# Altium PCB T962a.PcbDoc
Units mm, origin at the board's own origin, x right, y up, seen from the top; angles counter-clockwise.
Board outline 93 x 70.03 mm, 2 copper layers (Top Layer, Bottom Layer); 73 components, 72 nets, 284 pads, 122 vias.
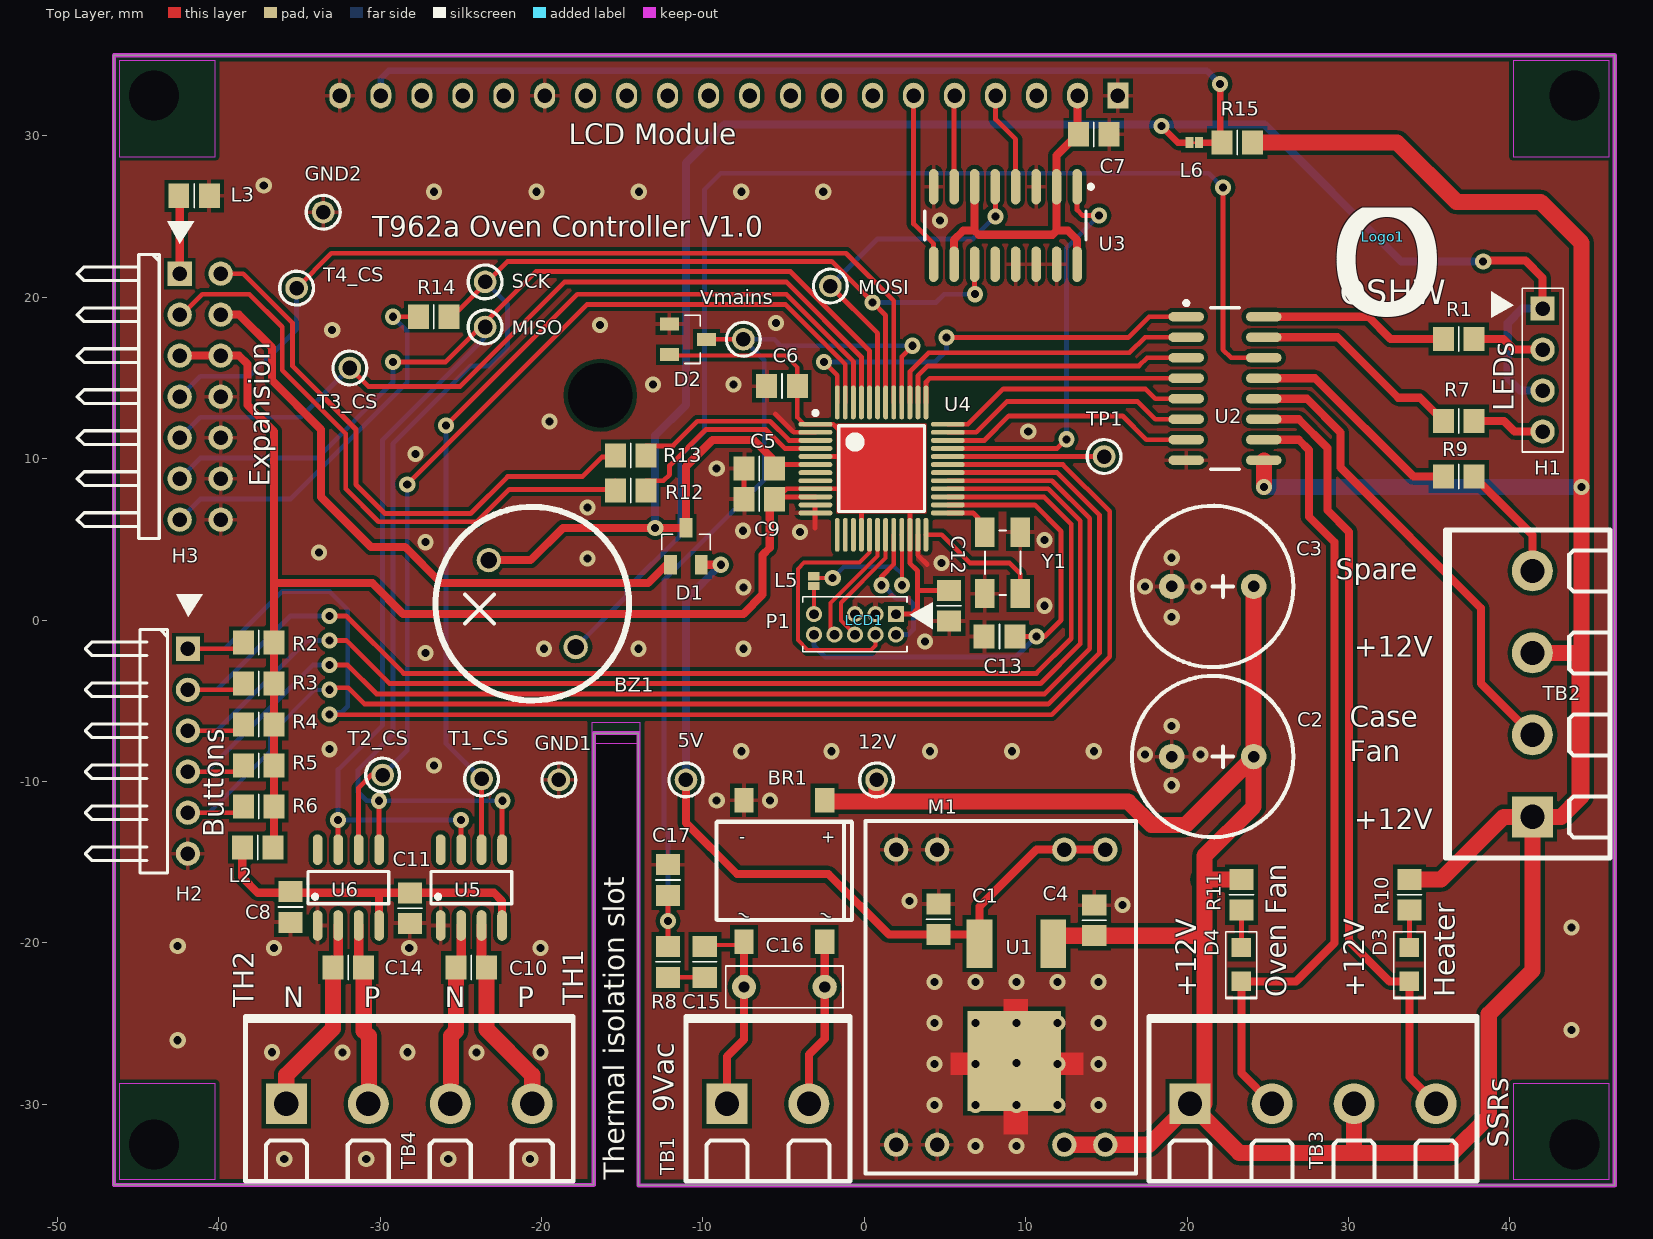
[diagram p0: Top Layer view]
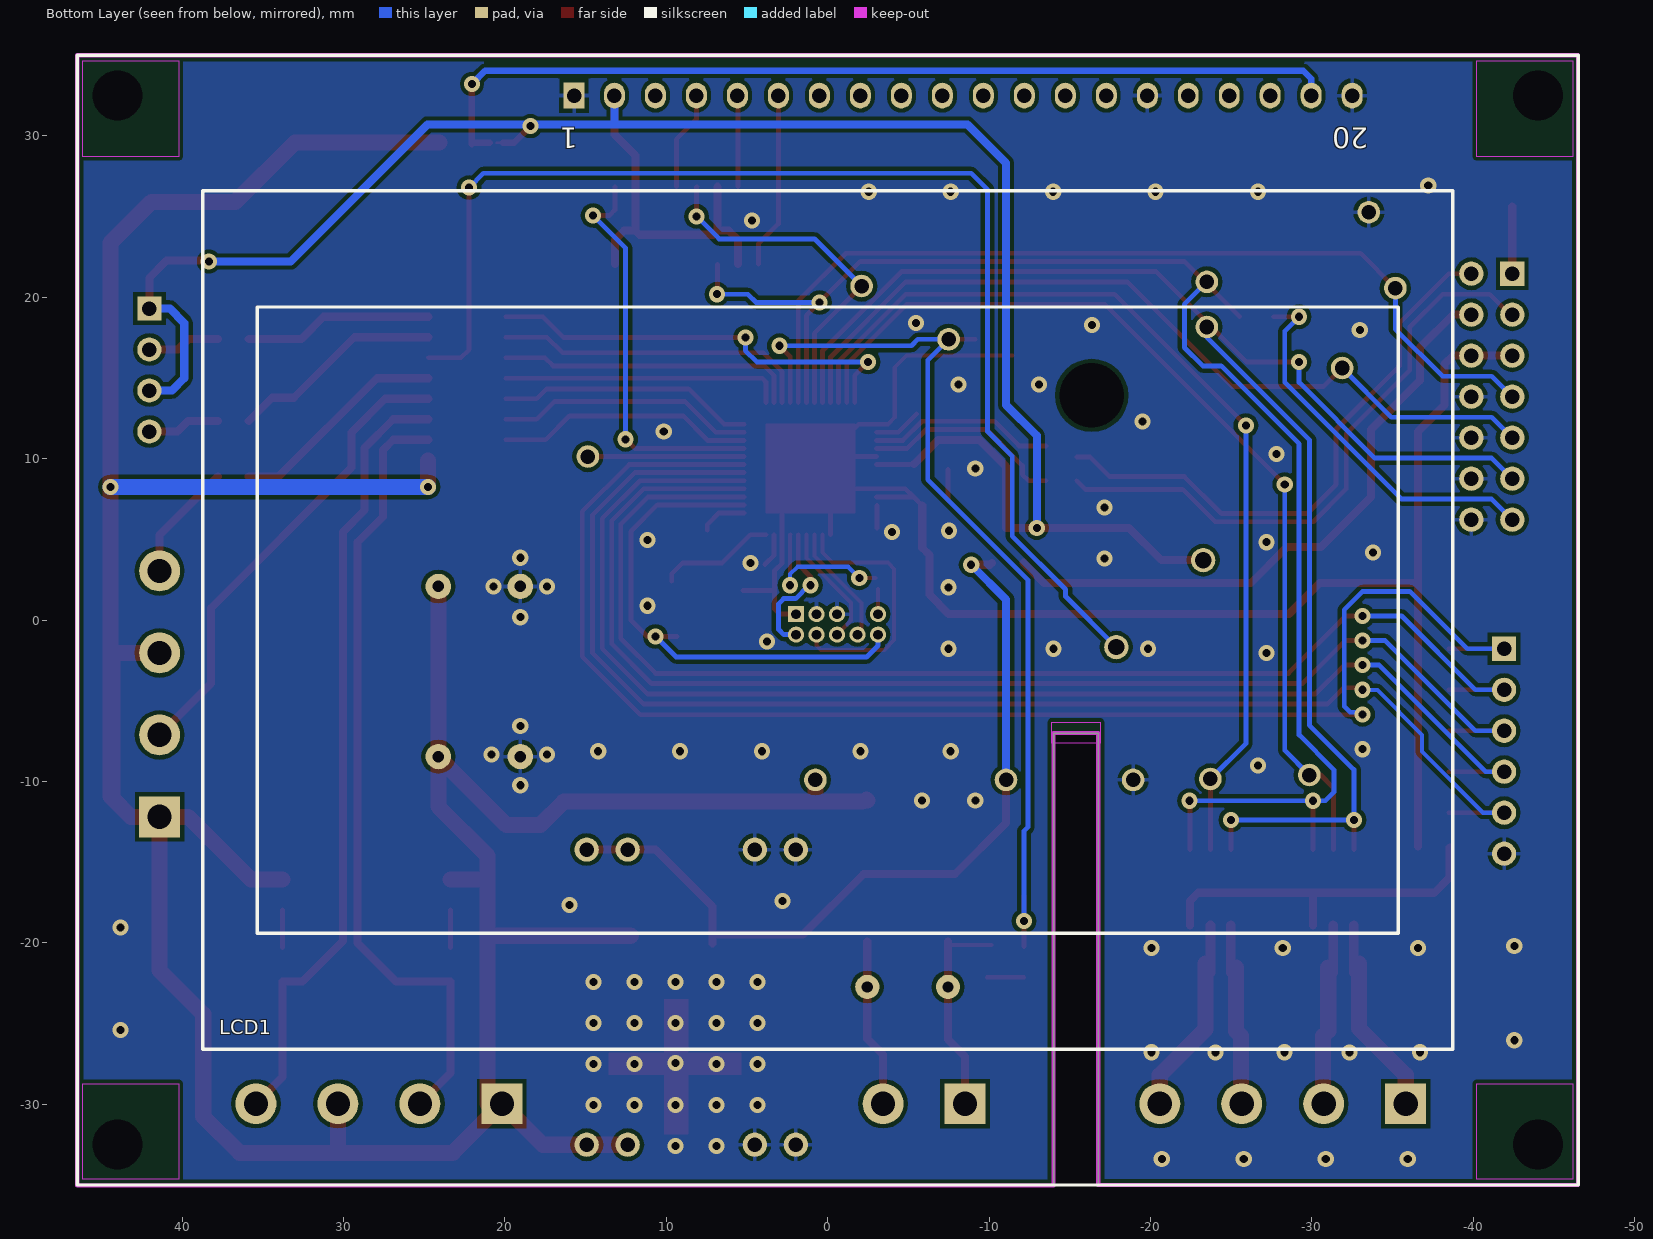
[diagram p1: Bottom Layer view, seen from below]
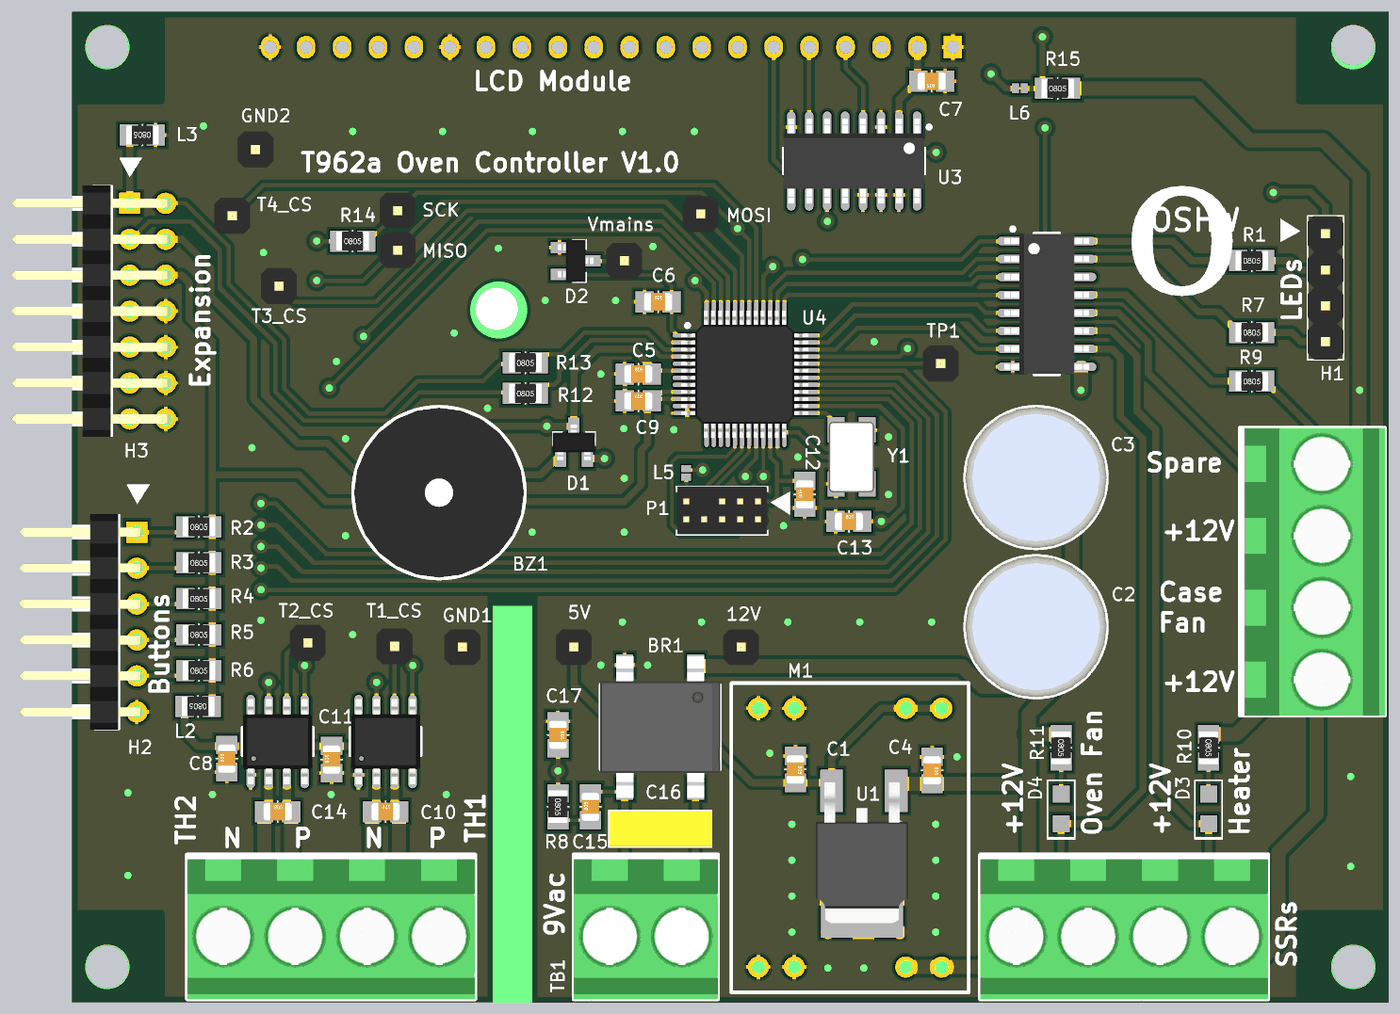
[diagram p2: 3D render of the assembled board from above, using the file's embedded part models]

## Layer stack, top to bottom
Top Solder: solder mask 0.0102, Solder Resist, Dk 3.5
Top Layer: signal copper 0.0356
Dielectric 1: dielectric 0.32, FR-4, Dk 4.8
Bottom Layer: signal copper 0.0356
Bottom Solder: solder mask 0.0102, Solder Resist, Dk 3.5

## Board outline
-46.495,-35 -46.495,35 46.505,35 46.505,-35.029 -14,-35.029 -14,-7 -16.764,-7 -16.764,-35

## Design rules (kind name [scope] priority, off if disabled: settings)
Clearance Clearance_Poly [InPoly] p1: gap=0.254
Clearance [All] p2: gap=0.178
HoleSize [All] p1: absolutevalues=TRUE maxlimit=2539.975 minlimit=0.025 maxpercent=80.000 minpercent=20.000
MinimumSolderMaskSliver [All] p1 off: minsoldermaskwidth=0.1
PlaneConnect PlaneConnect_Poly [IsVia] p1: planeconnectstyle=Direct reliefexpansion=0.508 reliefentries=4 reliefconductorwidth=0.254 reliefairgap=0.254
PlaneConnect [All] p2: planeconnectstyle=Relief reliefexpansion=0.508 reliefentries=4 reliefconductorwidth=0.254 reliefairgap=0.254
PolygonConnect PolygonConnect_Poly [IsVia] p1: connectstyle=Direct reliefconductorwidth=0.254 reliefentries=4 polygonreliefangle="90 Angle" airgapwidth=0.254
PolygonConnect [All] p2: connectstyle=Relief reliefconductorwidth=0.254 reliefentries=4 polygonreliefangle="90 Angle" airgapwidth=0.254
RoomDefinition T962a-P1 [InComponentClass('T962a-P1')] p1: confinementstyle=ConfineIn formatcopy=TRUE lockcomponents=FALSE outline -51.13,-36 51.181,-36 51.181,38.25 -51.13,38.25
RoutingVias [All] p1: holewidth=0.711 width=1.27 viastyle="Through Hole" minholewidth=0.711 minwidth=1.27 maxholewidth=0.711 maxwidth=1.27
SilkToBoardRegionClearance [All] p1 off:
SilkToSolderMaskClearance [IsPad] p1: minsilkscreentomaskgap=0.2 clearancetoexposedcopper=TRUE
SolderMaskExpansion [All] p1: expansion=0.102
Width [All] p1: maxlimit=1.016 minlimit=0.254 preferedwidth=0.254
25 further rules are at their usual default settings.

## Components (designator, comment, footprint, x,y, rotation, side; value= is the part's Value field where it differs from the comment)
5V "TP" "PCBPIN - 0.9mm" -11.049,-9.906 r0 top
12V "TP" "PCBPIN - 0.9mm" 0.762,-9.906 r0 top
BR1 "DF10S" BRIDGE-SMT -4.953,-15.545 r0 top
BZ1 "Buzzer_PCB" BUZZER_SMALL -20.574,1.016 r135 top
C1 "4u7/10V" CCNP2012-0805 4.604,-18.544 r270 top
C2 "470uF/25V" RB5/10x13mm 24.13,-8.458 r180 top
C3 "470uF/25V" RB5/10x13mm 24.13,2.083 r180 top
C4 "100nF" CCNP2012-0805 14.256,-18.61 r270 top
C5 "100nF" CCNP2012-0805 -6.498,9.398 r0 top
C6 "2u2F" CCNP2012-0805 -5.1,14.5 r0 top
C7 "100nF" CCNP2012-0805 14.224,30.099 r180 top
C8 "100nF" CCNP2012-0805 -35.56,-17.78 r90 top
C9 "2u2F/6V" CCNP2012-0805 -6.498,7.493 r0 top
C10 "10nF" CCNP2012-0805 -24.348,-21.531 r0 top
C11 "100nF" CCNP2012-0805 -28.158,-17.848 r90 top
C12 "100nF" CCNP2012-0805 5.258,0.889 r90 top
C13 "100nF" CCNP2012-0805 8.382,-1.016 r0 top
C14 "10nF" CCNP2012-0805 -31.968,-21.531 r0 top
C15 "100nF" CCNP2012-0805 -9.881,-21.184 r90 top
C16 "100nF/63Vac" "CAP - SMALL MKT" -4.953,-22.733 r0 top
C17 "1nF" CCNP2012-0805 -12.167,-16.104 r270 top
D1 "PMEG2005CT" SOT23 -11.049,4.572 r0 top
D2 "BAT54S" SOT23 -10.922,17.399 r270 top
D3 "LED Red" LED-SMT-2 33.782,-21.336 r270 top
D4 "LED Red" LED-SMT-2 23.368,-21.336 r270 top
GND1 "TP" "PCBPIN - 0.9MM" -18.923,-9.906 r90 top
GND2 "TP" "PCBPIN - 0.9MM" -33.528,25.273 r90 top
H1 "Header 1x4" HDR1X4S 42.037,19.304 r270 top
H2 "Keyboard" HDR1X6H -41.91,-1.778 r270 top
H3 "2x5 Header" HDR2X7H -42.418,21.463 r270 top
L2 "FB" CR2012-0805 -37.592,-14.097 r180 top
L3 "FB" CR2012-0805 -41.529,26.289 r180 top
L5 "LinkOpen" SolderBridge(Open) -3.124,2.413 r90 top net-tie
L6 "LinkClosed" SolderBridge(Closed) 20.447,29.591 r180 top net-tie
LCD1 "LCD-XC-4617" LCD_XC-4617 0,0 r0 top locked
Logo1 "OSHW Logo" OSHW 32.131,23.749 r0 top
M1 "IT-IM130731001" IT-IM130731001 8.458,-23.368 r90 top
MISO "TP" "PCBPIN - 0.9mm" -23.495,18.161 r0 top
MOSI "TP" "PCBPIN - 0.9mm" -2.1,20.7 r0 top
P1 "SWD2X5" SWD-2X5 1.964,0.369 r180 top
R1 "390R" CR2012-0805 36.83,17.419 r0 top
R2 "4K7" CR2012-0805 -37.531,-1.397 r0 top
R3 "4K7" CR2012-0805 -37.531,-3.937 r0 top
R4 "4K7" CR2012-0805 -37.531,-6.477 r0 top
R5 "4K7" CR2012-0805 -37.531,-9.017 r0 top
R6 "4K7" CR2012-0805 -37.531,-11.557 r0 top
R7 "390R" CR2012-0805 36.83,12.339 r0 top
R8 "47K" CR2012-0805 -12.167,-21.184 r270 top
R9 "DNP" CR2012-0805 36.83,8.89 r0 top
R10 "10K" CR2012-0805 33.782,-17.018 r270 top
R11 "10K" CR2012-0805 23.368,-17.018 r270 top
R12 "33R" CR2012-0805 -14.478,8.036 r0 top
R13 "33R" CR2012-0805 -14.478,10.195 r0 top
R14 "85R" CR2012-0805 -26.67,18.796 r0 top
R15 "1K" CR2012-0805 23.114,29.591 r0 top
SCK "TP" "PCBPIN - 0.9mm" -23.495,20.955 r0 top
T1_CS "TP" "PCBPIN - 0.9mm" -23.713,-9.847 r0 top
T2_CS "TP" "PCBPIN - 0.9mm" -29.845,-9.601 r90 top
T3_CS "TP" "PCBPIN - 0.9mm" -31.877,15.621 r90 top
T4_CS "TP" "PCBPIN - 0.9mm" -35.179,20.574 r90 top
TB1 "Terminal2" MOLEX-39544-3002 -8.509,-29.972 r270 top
TB2 "Terminal4" MOLEX-39544-3004 41.402,-12.192 r0 top
TB3 "Terminal4" MOLEX-39544-3004 20.193,-29.972 r270 top
TB4 "Terminal4" MOLEX-39544-3004 -35.814,-29.972 r270 top
TP1 "TP" "PCBPIN - 0.9MM" 14.859,10.136 r0 top
U1 "NCP5501DT50RKG" TO-252 9.43,-23.69 r180 top
U2 "ULN2003ADR" SO-16_N 22.352,14.351 r0 top
U3 "74HCT157N" SO-16_N 8.745,24.453 r270 top
U4 "MK20DX128VLF5" TSQFP50P900X900-48M 1.075,9.386 r0 top
U5 "MAX31855KASA+T" SO-8_L -24.348,-16.578 r90 top
U6 "MAX31855KASA+T" SO-8_L -31.968,-16.578 r90 top
Vmains "TP" "PCBPIN - 0.9mm" -7.493,17.399 r0 top
Y1 "ABM3B-8.000MHZ-B2-T" "CRYSTAL_SMT - ABM3B" 8.568,3.544 r90 top

## Footprints (in the part's own frame and the unit in brackets; to place one, negate y for a bottom-side part, rotate by r counter-clockwise, add the part's x,y. Pads: shape width x height; smd on the part's side, far side on the other; paste and mask are expansions set on the pad)
BRIDGE-SMT [mm] "Bridge rectifier SMT"
  rect 1.2x1.52 smd: 1(2.5,4.375) 2(-2.5,4.375) 3(-2.5,-4.375) 4(2.5,-4.375)
  silkscreen extent -4.2,-3.05 4.2,3.05, body extent -4.24,-5.01 4.26,4.99, height 2.93
BUZZER_SMALL [mm] "BUZZER -  Adafruit"
  round 1.5 hole 1: 1(-3.81,0) 2(3.81,0)
  silkscreen extent -6,-6 6,6, body extent -5.99,-6 5.99,6, height 10
"CAP - SMALL MKT" [mm] "MKT Polyester block capacitor"
  round 1.5 hole 0.7: 1(-2.5,0) 2(2.5,0)
  silkscreen extent -3.63,-1.3 3.63,1.3, body extent -3.6,-1.25 3.6,1.25, height 6.5
CCNP2012-0805 [mm]
  rect 1.3x1.5 smd: 1(-0.95,0) 2(0.95,0)
  silkscreen extent 0,-0.75 0,0.75, body extent -1,-0.62 1,0.63, height 0.78
CR2012-0805 [mm]
  rect 1.3x1.5 smd: 1(-0.95,0) 2(0.95,0)
  silkscreen extent 0,-0.75 0,0.75, body extent -1.15,-0.67 1.15,0.68, height 0.76
"CRYSTAL_SMT - ABM3B" [mm] "Crystal SMT low profile (5.0 x 3.2 mm)"
  rect 1.8x1.2 smd: 1(-1.9,-1.1) 2(1.9,-1.1) 3(1.9,1.1) 4(-1.9,1.1)
  silkscreen extent -2,-1.1 2,1.1, body extent -2.51,-1.59 2.49,1.61, height 1.15
HDR1X4S [mm] "Connector; Header; 5 Position; Straight"
  rect 1.5x1.5 hole 0.9: 1(0,0)
  round 1.5 hole 0.9: 2(2.54,0) 3(5.08,0) 4(7.62,0)
  silkscreen extent -1.27,-3.18 8.89,1.27, body extent -1.27,-1.27 8.89,1.27, height 6
HDR1X6H [mm] "Connector; Header; 6 Position; Right Angle"
  rect 1.5x1.5 hole 0.9: 1(0,0)
  round 1.5 hole 0.9: 2(2.54,0) 3(5.08,0) 4(7.62,0) 5(10.16,0) 6(12.7,0)
  silkscreen extent -3.38,-6.35 13.89,0.91, body extent -1.27,-8.3 13.97,0.33, height 2.54
HDR2X7H [mm] "Connector; Header; 2x7 Position; Right Angle"
  rect 1.5x1.5 hole 0.9: 1(0,0)
  round 1.5 hole 0.9: 2(0,2.54) 3(2.54,0) 4(2.54,2.54) 5(5.08,0) 6(5.08,2.54) 7(7.62,0) 8(7.62,2.54) 9(10.16,0) 10(10.16,2.54) 11(12.7,0) 12(12.7,2.54) 13(15.24,0) 14(15.24,2.54)
  silkscreen extent -3.24,-6.35 16.41,0.89, body extent -1.27,-8.33 16.51,2.84, height 5.08
IT-IM130731001 [mm] "Buck Converter module"
  round 1.5 hole 0.9: IN0+(-9.144,-3.937) IN0-(-9.144,6.477) IN1+(-9.144,-6.477) IN1-(-9.144,3.937) OUT0+(9.144,-3.937) OUT0-(9.144,6.477) OUT1+(9.144,-6.477) OUT1-(9.144,3.937)
  silkscreen extent -10.92,-8.38 10.92,8.38, body extent -10.92,-8.38 10.92,8.38, height 6
LCD_XC-4617 [mm] "Duinotech XC-4617 128 x 64 LCD"
  round 3 hole 4: 0(-16.355,13.925)
  rect 1.3x1.6 hole 0.9: 1(15.72,32.5)
  oval 1.3x1.6 hole 0.9: 2(13.22,32.5) 3(10.68,32.5) 4(8.14,32.5) 5(5.6,32.5) 6(3.06,32.5) 7(0.52,32.5) 8(-2.02,32.5) 9(-4.56,32.5) 10(-7.1,32.5) 11(-9.64,32.5) 12(-12.18,32.5) 13(-14.72,32.5) 14(-17.26,32.5) 15(-19.8,32.5) 16(-22.34,32.5) 17(-24.88,32.5) 18(-27.42,32.5) 19(-29.96,32.5) 20(-32.5,32.5)
  round 3 hole 3.1: 21(-44,32.5) 22(44,32.5) 23(44,-32.5) 24(-44,-32.5)
  body extent -46.5,-35 46.5,35, height 11.3
LED-SMT-2 [mm] "Medium SMT LED HSMx-C170 (0805)"
  rect 1.2x1.2 smd: A(-1.05,0) K(1.05,0)
  silkscreen extent -2.03,-0.96 2.13,0.96, body extent -1.78,-0.76 1.78,0.76, height 1
MOLEX-39544-3002 [mm] "Wire-To-Board Terminal Block"
  rect 2.54x2.54 hole 1.5: 1(0,0)
  round 2.54 hole 1.5: 2(0,5.08)
  silkscreen extent -5.4,-2.54 4.83,7.62, body extent -5.08,-2.54 4.83,7.62, height 14.6
MOLEX-39544-3004 [mm] "Wire-To-Board Terminal Block"
  rect 2.54x2.54 hole 1.5: 1(0,0)
  round 2.54 hole 1.5: 2(0,5.08) 3(0,10.16) 4(0,15.24)
  silkscreen extent -5.4,-2.54 4.83,17.78, body extent -5.08,-2.54 4.83,17.78, height 14.6
OSHW [mm] "OSHW Logo"
"PCBPIN - 0.9mm" [mm]
  round 1.4 hole 0.9: 1(0,0)
  silkscreen extent -1.05,-1.05 1.05,1.05, body extent -1.27,-1.27 1.27,1.27, height 6
"PCBPIN - 0.9MM" [mm]
  round 1.4 hole 0.9: 1(0,0)
  silkscreen extent -1.05,-1.05 1.05,1.05, body extent -1.27,-1.27 1.27,1.27, height 6
RB5/10x13mm [mil]
  round 62 hole 28: 1(0,0) 2(200,0)
  silkscreen extent -97,-197 297,197, body extent -97,-197 297,197, height 512
SO-8_L [mm] "8-Pin Small Outline Integrated Circuit 1.27 mm Pitch, IPC High Density"
  oval 1.9x0.6 smd: 1(-2.35,1.905) 2(-2.35,0.635) 3(-2.35,-0.635) 4(-2.35,-1.905) 5(2.35,-1.905) 6(2.35,-0.635) 7(2.35,0.635) 8(2.35,1.905)
  silkscreen extent -1,-2.5 1,2.5, body extent -3,-2.45 3,2.45, height 1.7
SO-16_N [mm] "16-Pin Small Outline Integrated Circuit 1.27 mm Pitch, IPC Medium Density"
  oval 2.2x0.6 smd: 1(-2.4,4.445) 2(-2.4,3.175) 3(-2.4,1.905) 4(-2.4,0.635) 5(-2.4,-0.635) 6(-2.4,-1.905) 7(-2.4,-3.175) 8(-2.4,-4.445) 9(2.4,-4.445) 10(2.4,-3.175) 11(2.4,-1.905) 12(2.4,-0.635) 13(2.4,0.635) 14(2.4,1.905) 15(2.4,3.175) 16(2.4,4.445)
  silkscreen extent -2.52,-5 0.9,5.42, body extent -3,-4.95 3,4.95, height 1.4
SolderBridge(Closed) [mm]
  rect 0.5x0.7 smd: 1(-0.305,0) 2(0.305,0)
  Top Layer region: -0.152,-0.076 0.152,-0.076 0.152,0.076 -0.152,0.076
SolderBridge(Open) [mm]
  rect 0.5x0.7 smd: 1(-0.305,0) 2(0.305,0)
SOT23 [mm] "SOT-23; 3 Leads; Body 3.0 x 2.3 mm, inc. leads (LxW max)"
  rect 0.8x1.2 smd: 1(-0.95,-1.15) 2(0.95,-1.15) 3(0,1.15)
  silkscreen extent -1.5,-0.2 1.5,0.75, body extent -1.5,-1.25 1.5,1.25, height 1.05
SWD-2X5 [mm] "Connector; SWD; 2x5 Position"
  rect 1x1 hole 0.6: 1(0,0)
  round 1 hole 0.6: 2(0,1.27) 3(1.27,0) 4(1.27,1.27) 5(2.54,0) 6(2.54,1.27) 8(3.81,1.27) 9(5.08,0) 10(5.08,1.27)
  silkscreen extent -2.27,-1.06 5.77,2.33, body extent -0.63,-1.09 5.72,2.31, height 4.5
TO-252 [mm] "TO-252 Package"
  rect 1.6x3 smd: 1(-2.285,-3.64) 3(2.285,-3.64)
  rect 5.8x6.2 smd: 4(0.127,3.64)
  body extent -3.14,-4.23 3.4,5.71, height 2.29
TSQFP50P900X900-48M [mm] "Thin QFP, 48-Leads, Body 7x7mm, Pitch 0.5mm, IPC Low Density"
  oval 2.1x0.3 smd: 1(-4.1,2.75) 2(-4.1,2.25) 3(-4.1,1.75) 4(-4.1,1.25) 5(-4.1,0.75) 6(-4.1,0.25) 7(-4.1,-0.25) 8(-4.1,-0.75) 9(-4.1,-1.25) 10(-4.1,-1.75) 11(-4.1,-2.25) 12(-4.1,-2.75) 25(4.1,-2.75) 26(4.1,-2.25) 27(4.1,-1.75) 28(4.1,-1.25) 29(4.1,-0.75) 30(4.1,-0.25) 31(4.1,0.25) 32(4.1,0.75) 33(4.1,1.25) 34(4.1,1.75) 35(4.1,2.25) 36(4.1,2.75)
  oval 0.3x2.1 smd: 13(-2.75,-4.1) 14(-2.25,-4.1) 15(-1.75,-4.1) 16(-1.25,-4.1) 17(-0.75,-4.1) 18(-0.25,-4.1) 19(0.25,-4.1) 20(0.75,-4.1) 21(1.25,-4.1) 22(1.75,-4.1) 23(2.25,-4.1) 24(2.75,-4.1) 37(2.75,4.1) 38(2.25,4.1) 39(1.75,4.1) 40(1.25,4.1) 41(0.75,4.1) 42(0.25,4.1) 43(-0.25,4.1) 44(-0.75,4.1) 45(-1.25,4.1) 46(-1.75,4.1) 47(-2.25,4.1) 48(-2.75,4.1)
  silkscreen extent -4.22,-2.65 2.65,3.57, body extent -4.55,-4.5 4.45,4.5, height 1.6

## Part data
5V 12V GND1 GND2 MISO MOSI SCK T1_CS T2_CS T3_CS T4_CS TP1 Vmains: "Test Point"
BR1: "bRIDGE rECTIFIER"
BZ1: "Buzzer (Adafruit 1536)"
C1 C8 C10 C11 C13 C14: library part Cap_CCNP_0805, "Capacitor SMT 0805"
C2 C3: library part Cap-25ZLS470MEFC10X12, "Polarized Capacitor"
C4 C5 C6 C7 C9 C12 C15 C16 C17: library part Cap, "Capacitor"
D1: "Dual Schottky Diode (SMT)"
D2: "Dual Diode (SMT)"
D3 D4: library part "LED SMT,Red", "LED (Red SMT)"
H1: "Header, 5-Pin, Right Angle"
H2: library part "Header 6", "Header, 6-Pin"
H3: library part "Header 2x7H", "Header 2x7"
L2 L3: library part "Ferrite Bead 0805", "Ferrite Bead (0805) 0.045OHM, 2A"
LCD1: "LCD 128 x 64 pixel, ST7920 controller & contrast pot (Jaycar XC-4617)"
M1: "Itead Buck converter"
P1: "SWD Connector 2x5-Pin"
R1 R2 R3 R4 R5 R6 R7 R8 R9 R10 R11 R12 R13 R14 R15: library part Res_CR0805, "Resistor"
TB1: "MULTICOMP  MC24366 Wire-To-Board Terminal Block"
TB2 TB3 TB4: "MULTICOMP MC24368 Wire-To-Board Terminal Block"
U1: "Fixed LDO Voltage Regulator, 2.5V-16V in, 230mV Dropout, 5V/500mA out, TO-252-3"
U3: "Quad 2-1 Multiplexor"
U4: "Arm Cortex M4"
Y1: "Crystal 8MHz (MINIATURE SMT ABM3B)"

## Via types
v1: diameter 1, hole 0.5, Top Layer to Bottom Layer, tented both sides, 122 vias

## Nets (pads, with @x,y where several pads share a name; then routed paths per layer and width w, separated by ;. In a path a pad name is that pad's centre, name@x,y a point inside that pad or via, vN(x,y) a via of type N, cw(c..) or ccw(c..) an arc to the next point about the centre after c; other vN are vias at no path point)
3V3: C6.2 C9.2 C12.2 D2.2 H3.5 H3.6 L2.1 P1.1 R2.2 R3.2 R4.2 R5.2 R6.2 U4.1 U4.5 U4.9 U4.10 U4.16 U4.22 | length 110.4
  Top Layer w0.254: -11.437,16.383 -4.883,16.383 -4.15,15.65 C6.2 -4.15,12.55 -3.736,12.136 U4.1
  Top Layer w0.3: C9.2@-5.855,7.094 C9.2@-5.313,7.636 ; U4.10 C9.2@-5.313,7.636 ; U4.5 -0.461,10.136 ; U4.1 -3.025,12.133 -1.922,12.133 -0.952,11.163 ; -0.683,8.136 U4.9 -4.813,8.136 C9.2@-5.313,7.636 ; U4.16 -0.175,7.445 ; P1.1 2.98,0.369 3.3,0.689 3.3,3.05 2.825,3.525 U4.22 2.825,8.088 ; 3.31,1.839 C12.2
  Top Layer w0.5: H3.5 H3.6 -38.735,16.383 -38.227,15.875 -38.227,13.335 -36.581,11.689 -36.581,2.286 ; L2.1@-36.581,-14.036 R6.2 R5.2 R4.2 R3.2 R2.2 -36.581,2.286 ; C9.2@-5.855,7.094 -5.855,4.481 -6.299,4.036 -6.299,1.575 -7.493,0.381 -28.575,0.381 -30.48,2.286 -36.581,2.286
5V: BZ1.2 C5.2 C7.2 D1.3 H1.1 H1.3 L6.2 LCD1.2 U3.2 U3.6 U3.10 U3.16 U4.6 | length 144.5
  Top Layer w0.3: C5.2@-5.086,9.636 U4.6
  Top Layer w0.4: v1(18.415,30.607) 19.431,29.591 L6.2
  Top Layer w0.5: BZ1.2 -20.674,3.71 -18.669,5.715 v1(-12.954,5.715) D1.3@-11.056,5.715 ; D1.3 -11.049,9.525 -9.41,11.164 -6.846,11.164 C5.2@-5.341,9.659 ; U3.10 5.57,23.564 6.135,24.13 6.84,24.13 ; U3.6 6.84,24.13 ; U3.16 13.19,23.564 12.624,24.13 11.92,24.13 ; LCD1.2 13.22,30.094 11.92,28.793 U3.2 11.92,24.13 ; v1(38.354,22.225) 38.405,22.276 40.97,22.276 42.037,21.209 ; 6.84,24.13 7.094,23.876 11.666,23.876 11.92,24.13
  Top Layer w0.508: H1.1 42.037,21.209
  Bottom Layer w0.5: v1(-12.954,5.715) -12.954,11.43 -11.049,13.335 -11.049,28.321 -8.664,30.706 24.793,30.706 33.274,22.225 v1(38.354,22.225) ; 13.22,30.794 LCD1.2
  Bottom Layer w0.508: H1.3 40.64,14.224 39.878,14.986 39.878,18.415 40.767,19.304 H1.1
5VSUP: 5V.1 C1.2 D1.2 M1.OUT0+ M1.OUT1+ U1.3 | length 50.8
  Top Layer w0.5: 5V.1 -11.049,-12.573 -7.874,-15.748 -2.222,-15.748 1.524,-19.494 C1.2 U1.3@6.89,-19.494 ; D1.2@-10.167,3.537 -10.059,3.429 v1(-8.89,3.429) ; U1.3 7.145,-17.747 10.668,-14.224 12.573,-14.224 M1.OUT1+
  Bottom Layer w0.5: 5V.1@-11.049,-10.16 -11.049,1.27 v1(-8.89,3.429)
12V: 12V.1 BR1.1 C2.1 C3.1 C4.2 M1.IN0+ M1.IN1+ R10.1 R11.1 R15.2 TB2.1 TB2.3 TB3.1 TB3.3 U1.1 U2.9 | length 229.7
  Top Layer w1: BR1.1 BR1.1@-2.408,-11.125 ; BR1.1@-2.154,-11.252 16.358,-11.252 17.805,-12.7 19.914,-12.7 24.13,-8.484 24.13,-11.557 21.082,-14.605 TB3.1@21.082,-29.972 ; 0.762,-11.201 12V.1 ; U1.1@12.205,-19.56 C4.2 20.953,-19.56 ; M1.IN0+ 17.653,-32.512 TB3.1 23.241,-33.02 30.353,-33.02 ; 21.336,-16.068 R11.1 ; R15.2 33.02,29.591 36.703,25.908 41.91,25.908 44.45,23.368 44.45,21.819 44.45,20.955 v1(44.45,8.255) 44.45,-10.922 44.323,-11.049 ; C2.1 C3.1 ; v1(24.765,8.255) U2.9@24.765,9.893 ; TB3.3 30.353,-33.02 ; R10.1 35.748,-16.068 39.624,-12.192 TB2.1 ; TB2.3 44.323,-2.032 44.323,-11.049 ; 30.353,-33.02 36.449,-33.02 38.7,-30.769 38.7,-24.419 41.402,-21.717 TB2.1 ; TB2.1 43.18,-12.192 44.323,-11.049
  Bottom Layer w1: v1(24.765,8.255) v1(44.45,8.255)
ADC0_DM0: U4.8
ADC0_DP0: U4.7
BUZZER: U2.3 U4.38 | length 18.7
  Top Layer w0.3: U4.38 3.325,15.136 3.937,15.748 17.018,15.748 17.526,16.256 U2.3
BUZZERB: BZ1.1 U2.14 | length 77.3
  Top Layer w0.3: v1(22.225,26.797) 22.225,16.764 22.733,16.256 U2.14
  Bottom Layer w0.3: BZ1.1 -14.732,1.47 -14.732,1.905 -11.43,5.207 -11.43,10.16 -9.906,11.684 -9.906,26.67 -8.89,27.686 21.336,27.686 v1(22.225,26.797)
CASEFAN: U2.5 U4.36 | length 15.9
  Top Layer w0.3: U4.36 6.421,12.136 8.611,14.326 17.424,14.326 18.034,13.716 U2.5
CASEFANB: TB2.2 U2.12 | length 29.3
  Top Layer w0.5: U2.12 27.432,13.716 29.515,11.633 29.515,9.449 38.227,0.737 38.227,-3.937 TB2.2
EXTAL: U4.24 Y1.1 | length 7.3
  Top Layer w0.3: U4.24 4.794,5.286 6.536,3.544 8.99,3.544 9.668,2.865 Y1.1@9.668,2.406
EXTAL33: U4.15
EZP_CSB: L5.2 U4.21 | length 9.2
  Top Layer w0.254: L5.2@-2.972,2.616 v1@-2.108,2.616 ; U4.21 2.337,5.274 v1@2.337,2.388
  Bottom Layer w0.254: v1(-1.956,2.616) -1.27,3.302 1.88,3.302 2.337,2.845 v1(2.337,2.159)
EZP_CSLB: L5.1 P1.9 | length 1.6
  Top Layer w0.254: P1.9 L5.1@-3.116,1.93
FANLED: U2.2 U4.39 | length 19.9
  Top Layer w0.3: U4.39 2.825,15.398 3.988,16.561 16.434,16.561 17.399,17.526 U2.2
FANLEDB: R7.1 U2.15 | length 13.3
  Top Layer w0.5: U2.15 29.337,17.526 33.086,13.777 34.442,13.777 R7.1
FANLEDR: H1.4 R7.2 | length 4.5
  Top Layer w0.5: R7.2 39.644,12.339 40.299,11.684 H1.4
GND: BR1.2 C1.1 C2.2 C3.2 C4.1 C5.1 C6.1 C7.1 C8.1 C9.1 C11.1 C12.1 C13.1 C17.1 D2.1 GND1.1 GND2.1 H2.6 H3.8 H3.10 H3.12 H3.14 L3.1 LCD1.1 LCD1.15 LCD1.20 M1.IN0- M1.IN1- M1.OUT0- M1.OUT1- P1.3 P1.5 U1.4 U2.8 U3.3 U3.8 U3.13 U3.14 U3.15 U4.2 U4.11 U4.12 U4.23 U5.1 U6.1 Y1.2 Y1.4 | length 8.3
  Top Layer w0.3: C9.1@-7.452,7.442 C5.1@-7.452,9.347 ; -5.512,12.776 -4.371,11.636 U4.2 ; -3.048,5.715 U4.11@-3.048,7.113 ; U4.23 3.325,4.016 3.886,3.454
  other v1: -35.941,-33.401 -30.861,-33.401 -25.781,-33.401 -20.701,-33.401 6.89,-32.58 9.43,-32.58 4.35,-30.04 6.89,-30.04 9.43,-30.04 11.97,-30.04 14.51,-30.04 4.35,-27.5 6.89,-27.5 11.97,-27.5 14.51,-27.5 9.43,-27.457 -32.324,-26.8 -24.024,-26.8 -36.703,-26.781 -28.296,-26.781 -20.066,-26.781 -42.545,-26.035 43.815,-25.4 4.35,-24.96 6.89,-24.96 9.43,-24.96 11.97,-24.96 14.51,-24.96 4.35,-22.42 6.89,-22.42 9.43,-22.42 11.97,-22.42 14.51,-22.42 -36.576,-20.32 -28.194,-20.32 -20.066,-20.32 -42.545,-20.193 43.815,-19.05 16.002,-17.653 2.794,-17.399 -9.144,-11.176 -5.842,-11.176 19.05,-10.236 -26.67,-9.017 17.399,-8.331 20.828,-8.331 -7.62,-8.128 -2.032,-8.128 4.064,-8.128 9.144,-8.128 14.224,-8.128 -33.147,-8.001 19.05,-6.553 -27.178,-2.032 -19.837,-1.778 -13.995,-1.778 -7.493,-1.778 3.759,-1.321 19.05,0.178 11.176,0.889 -7.493,2.032 17.399,2.083 20.701,2.083 4.775,3.531 -17.145,3.81 19.05,3.861 -33.782,4.191 -27.178,4.826 11.176,4.953 -3.988,5.461 -7.518,5.537 -17.145,6.985 -9.144,9.398 -27.813,10.287 10.16,11.684 -19.5,12.3 -13.081,14.605 -8.1,14.6 -32.969,17.983 -16.383,18.288 -5.461,18.415 4.699,24.765 -26.67,26.543 -20.32,26.543 -13.97,26.543 -7.62,26.543 -2.54,26.543 -37.211,26.924
HEATER: U2.6 U4.35 | length 16
  Top Layer w0.3: U4.35 6.937,11.636 8.839,13.538 16.942,13.538 18.034,12.446 U2.6
HEATERB: D3.K TB3.4 U2.11 | length 48.8
  Top Layer w0.5: U2.11 26.924,12.446 28.702,10.668 28.702,6.807 30.048,5.461 30.048,-19.888 32.546,-22.386 D3.K 33.782,-28.321 TB3.4
HEATERLED: U2.1 U4.48 | length 27.1
  Top Layer w0.3: v1(-2.5,16) -1.675,15.175 U4.48 ; v1@5.1,17.399 v1@5.201,17.5 ; v1(5.1,17.5) v1@5.201,17.5 ; U2.1 17.653,18.796 16.357,17.5 v1@5.201,17.5
  Bottom Layer w0.3: v1(-2.5,16) 4.4,16 5.1,16.7 v1(5.1,17.5)
HEATERLEDB: R1.1 U2.16 | length 11.7
  Top Layer w0.5: U2.16 31.242,18.796 32.619,17.419 R1.1
HEATERLEDR: H1.2 R1.2 | length 4.5
  Top Layer w0.5: R1.2 39.604,17.419 40.259,16.764 H1.2
L_CS*: U3.1 U4.33 | length 25.2
  Top Layer w0.3: U4.33 11.956,10.636 v1(12.522,11.201) ; U3.1 13.19,25.419 13.545,25.063 v1(14.536,25.063)
  Bottom Layer w0.3: v1(12.522,11.201) 12.522,23.049 v1(14.536,25.063)
L_CSB: LCD1.4 U3.4 | length 6.2
  Top Layer w0.3: LCD1.4 8.14,31.027 9.38,29.787 U3.4
MISO: H3.11 MISO.1 U4.44 U5.7 U6.7 | length 99.9
  Top Layer w0.3: U6.7 v1(-32.603,-12.387) ; v1(-29.21,16.002) -25.933,16.002 -20.345,21.59 -4.572,21.59 0.325,16.693 U4.44 ; U5.7 v1(-24.983,-12.387)
  Bottom Layer w0.3: H3.11 -41.148,10.033 -33.909,10.033 -29.21,14.732 v1(-29.21,16.002) ; v1(-24.983,-12.387) v1(-32.603,-12.387) -32.603,-9.265 -29.845,-6.507 -29.845,11.176 -23.495,17.526 MISO.1@-23.495,18.415
MOSI: MOSI.1 U3.5 U4.43 | length 22.3
  Top Layer w0.3: MOSI.1 0.825,17.775 U4.43 ; U3.5 8.128,26.835 v1(8.128,25.019)
  Bottom Layer w0.3: MOSI.1 0.822,23.622 6.731,23.622 v1(8.128,25.019)
MOSIB: LCD1.5 U3.7 | length 5.5
  Top Layer w0.3: U3.7 5.57,32.355 LCD1.5@5.6,32.385
NetBR1_3: BR1.3 C15.2 C16.1 TB1.1 | length 13.2
  Top Layer w0.254: C15.2@-10.16,-20.132 BR1.3@-7.453,-20.132
  Top Layer w0.508: TB1.1 -8.509,-27.051 -7.453,-25.995 -7.453,-20.132 BR1.3
NetBR1_4: BR1.4 C16.2 TB1.2 | length 10.5
  Top Layer w0.508: TB1.2 -3.429,-26.924 -2.453,-25.948 -2.453,-22.9 BR1.4
NetC15_1: C15.1 R8.2 | length 2.3
  Top Layer w0.254: R8.2 C15.1
NetD3_A: D3.A R10.2 | length 2.3
  Top Layer w0.3: D3.A R10.2
NetD4_A: D4.A R11.2 | length 2.3
  Top Layer w0.3: D4.A R11.2
NetH3_13: H3.13 R14.1 | length 23.8
  Top Layer w0.3: v1@-29.337,18.796 v1(-29.21,18.796) R14.1
  Bottom Layer w0.3: H3.13 -41.148,7.493 -35.56,7.493 -28.321,14.732 -28.321,17.907 v1(-29.21,18.796)
NetL6_1: L6.1 LCD1.19 R15.1 | length 58.3
  Top Layer w0.4: L6.1@20.955,29.591 R15.1@21.935,29.591 ; R15.1@22.047,29.479 v1(22.047,33.223)
  Bottom Layer w0.4: LCD1.19 -29.96,33.54 -29.464,34.036 21.234,34.036 v1(22.047,33.223)
OVENFAN: U2.7 U4.34 | length 16
  Top Layer w0.3: U4.34 7.453,11.136 8.966,12.649 16,12.649 17.474,11.176 U2.7
OVENFANB: D4.K TB3.2 U2.10 | length 49.4
  Top Layer w0.5: U2.10 26.924,11.176 27.559,10.541 27.559,6.401 29.134,4.826 29.134,-20.015 26.763,-22.386 D4.K 23.368,-28.067 TB3.2
PTB17: TP1.1 U4.32 | length 9.7
  Top Layer w0.3: U4.32 TP1.1
RESETB: C13.2 P1.10 U4.26 | length 31.8
  Top Layer w0.3: U4.26 10.564,7.136 12.192,5.508 12.192,0 11.176,-1.016 C13.2
  Bottom Layer w0.3: P1.10 -3.116,-1.583 -2.413,-2.286 9.398,-2.286 v1(10.668,-1.016)
SCK: R14.2 SCK.1 U3.11 U4.42 U5.5 U6.5 | length 95.7
  Top Layer w0.3: U6.5 v1(-30.063,-11.198) ; R14.2@-25.527,18.796 -22.098,22.225 -2.025,22.225 v1(0.515,19.685) 1.325,18.875 U4.42 ; U5.5 v1@-22.443,-11.198 ; U3.11 6.84,20.211 v1(6.858,20.193) v1@7.094,19.957
  Bottom Layer w0.3: SCK.1 -22.098,19.558 -22.098,16.891 -23.241,15.748 -24.384,15.748 -29.21,10.922 -29.21,-7.112 -31.369,-9.271 -31.369,-10.668 -30.839,-11.198 v1(-30.063,-11.198) v1(-22.424,-11.198) ; v1(0.515,19.685) 4.444,19.685 4.952,20.193 v1(6.858,20.193)
SCKB: LCD1.6 U3.9 | length 11
  Top Layer w0.3: LCD1.6@3.06,32.512 3.06,24.55 4.3,23.31 U3.9
SPARE: U2.4 U4.37 | length 17.5
  Top Layer w0.3: U4.37 3.825,14.747 4.064,14.986 U2.4
SPAREB: R9.1 U2.13 | length 13.7
  Top Layer w0.5: U2.13 27.94,14.986 34.036,8.89 R9.1
SPARER: R9.2 TB2.4 | length 7.3
  Top Layer w0.5: R9.2 41.402,5.268 TB2.4
SW_F1: H2.5 R6.1 U4.30 | length 84.5
  Top Layer w0.3: H2.5 R6.1@-38.481,-11.938 ; v1@-33.147,-4.191 -31.979,-4.191 -30.963,-5.207 11.405,-5.207 14.58,-2.032 14.58,6.502 11.946,9.136 U4.30
  Bottom Layer w0.254: H2.5 -40.615,-11.938 -36.83,-8.153 -36.83,-7.112 -34.061,-4.343 -33.299,-4.343 v1@-33.147,-4.191
  other v1: -33.147,-4.318
SW_F2: H2.4 R5.1 U4.29 | length 81.8
  Top Layer w0.3: H2.4 R5.1@-38.481,-9.398 ; v1(-33.147,-2.794) -32.004,-2.794 -30.226,-4.572 11.176,-4.572 13.97,-1.778 13.97,6.299 11.634,8.636 U4.29
  Bottom Layer w0.3: H2.4 -40.767,-9.398 -34.163,-2.794 v1(-33.147,-2.794)
SW_F3: H2.3 R4.1 U4.28 | length 79.8
  Top Layer w0.3: H2.3 R4.1@-38.481,-6.858 ; v1(-33.147,-1.27) -32.08,-1.27 -29.413,-3.937 10.922,-3.937 13.386,-1.473 13.386,6.147 11.397,8.136 U4.28
  Bottom Layer w0.3: H2.3 -40.132,-6.858 -34.544,-1.27 v1(-33.147,-1.27)
SW_F4: H2.2 R3.1 U4.27 | length 77.9
  Top Layer w0.3: H2.2 R3.1@-38.481,-4.318 ; v1(-33.147,0.254) -32.106,0.254 -28.55,-3.302 10.668,-3.302 12.827,-1.143 12.827,5.944 11.135,7.636 U4.27
  Bottom Layer w0.3: H2.2 -40.132,-4.318 -35.56,0.254 v1(-33.147,0.254)
SW_S: H2.1 R2.1 U4.31 | length 92.7
  Top Layer w0.3: H2.1 R2.1@-38.481,-1.778 ; v1@-33.147,-5.715 -32.995,-5.867 11.608,-5.867 15.215,-2.261 15.215,6.731 12.31,9.636 U4.31
  Bottom Layer w0.3: H2.1 -39.624,-1.778 -36.068,1.778 -33.147,1.778 -32.004,0.635 -32.004,-5.346 -32.373,-5.715 v1@-33.147,-5.715
  other v1: -33.147,-5.842
SWD_CLK: P1.4 U4.17 | length 16.2
  Top Layer w0.254: U4.17 0.325,4.176 -0.295,3.556 -3.734,3.556 -4.115,3.175 -4.115,-1.245 -3.505,-1.854 0.406,-1.854 0.694,-1.567 P1.4
SWD_DIO: P1.2 U4.20 | length 8.2
  Top Layer w0.3: 1.067,2.692 1.825,3.451 U4.20
  Bottom Layer w0.3: v1(1.067,2.159) 1.166,2.159 1.994,1.331 2.733,1.331 3.048,1.016 3.048,-0.584 2.731,-0.901 P1.2
SWD_RX: P1.8 U4.18 | length 7.5
  Top Layer w0.254: P1.8 -2.083,-0.665 -2.083,1.067 0.825,3.975 U4.18
SWD_TX: P1.6 U4.19 | length 7.7
  Top Layer w0.254: P1.6 -1.44,-0.038 -1.44,1.075 1.325,3.84 U4.19
T1+: C10.2 TB4.4 U5.3 | length 12.8
  Top Layer w0.6: C10.2@-23.713,-21.851 U5.3
  Top Layer w1: C10.2@-23.398,-21.277 -23.398,-25.37 -20.574,-28.194 TB4.4
T1-: C10.1 TB4.3 U5.2 | length 10.2
  Top Layer w0.6: C10.1@-24.983,-21.851 U5.2
  Top Layer w1: -25.618,-28.626 -25.618,-25.781 -25.298,-25.461 C10.1
T1_CS*: T1_CS.1 U4.46 U5.6 | length 60.1
  Top Layer w0.3: v1(-25.908,12.065) -17.78,20.193 -4.826,20.193 -0.675,16.042 U4.46 ; U5.6 T1_CS.1
  Bottom Layer w0.3: v1(-25.908,12.065) -25.908,-7.652 T1_CS.1
T2+: C14.2 TB4.2 U6.3 | length 11.5
  Top Layer w0.6: C14.2@-31.333,-21.851 U6.3
  Top Layer w1: C14.2 -31.018,-25.461 -30.698,-25.781 TB4.2@-30.698,-29.972
T2-: C14.1 TB4.1 U6.2 | length 12.8
  Top Layer w0.6: C14.1@-32.603,-21.851 U6.2
  Top Layer w1: TB4.1 -35.814,-28.194 -32.918,-25.298 C14.1@-32.918,-21.277
T2_CS*: T2_CS.1 U4.47 U6.6 | length 60
  Top Layer w0.3: U6.6 -31.333,-10.39 -30.544,-9.601 T2_CS.1 ; v1(-28.321,8.407) -17.17,19.558 -4.887,19.558 -1.175,15.846 U4.47
  Bottom Layer w0.3: T2_CS.1 -28.321,-8.077 v1(-28.321,8.407)
T3_CS*: H3.9 T3_CS.1 U4.45 | length 51.9
  Top Layer w0.3: T3_CS.1 -30.734,14.478 -25.044,14.478 -18.567,20.955 -4.826,20.955 -0.175,16.304 U4.45
  Bottom Layer w0.3: H3.9 -41.148,12.573 -34.925,12.573 T3_CS.1
T4_CS*: H3.7 T4_CS.1 U4.41 | length 56.9
  Top Layer w0.3: T4_CS.1 -33.02,22.733 -1.133,22.733 1.825,19.775 U4.41
  Bottom Layer w0.3: H3.7 -41.148,15.113 -38.1,15.113 -35.179,18.034 T4_CS.1
USB_5V: D1.1 H3.4 | length 38.8
  Top Layer w0.5: H3.4 -38.735,18.923 -36.703,16.891 -36.703,14.859 -33.655,11.811 -33.655,7.62 -30.556,4.521 -28.448,4.521 -26.213,2.286 -13.403,2.286 D1.1@-12.133,3.556
USB_DM: R12.2 U4.4 | length 12.6
  Top Layer w0.3: R12.2@-13.528,8.636 -12.446,8.636 -12.065,9.017 -12.065,9.576 -9.83,11.811 -6.096,11.811 -4.921,10.636 U4.4
USB_DMB: H3.3 R12.1 | length 38
  Top Layer w0.3: H3.3 -42.291,18.923 -41.021,20.193 -38.1,20.193 -36.068,18.161 -36.068,15.494 -32.131,11.557 -32.131,8.128 -30.099,6.096 -24.003,6.096 -21.999,8.1 -15.964,8.1 R12.1@-15.428,8.636
USB_DP: R13.2 U4.3 | length 11.6
  Top Layer w0.3: R13.2@-13.528,10.795 -11.862,10.795 -10.338,12.319 -5.842,12.319 -4.659,11.136 U4.3
USB_DPB: H3.2 R13.1 | length 35.6
  Top Layer w0.3: H3.2 -38.481,21.463 -35.433,18.415 -35.433,15.748 -31.496,11.811 -31.496,8.382 -29.718,6.604 -24.384,6.604 -22.098,8.89 -17.466,8.89 -16.256,10.1 R13.1@-15.428,10.1
USB_GND: H3.1 L3.2 | length 4.2
  Top Layer w0.5: H3.1 L3.2@-42.418,25.629
VADC: C8.2 C11.2 L2.2 U5.4 U6.4 | length 22.1
  Top Layer w0.508: L2.2 -38.542,-15.941 -37.585,-16.898 C11.2 -22.944,-16.898 -22.443,-17.399 U5.4 ; U6.4 -30.063,-16.891
VMAINS: C17.2 D2.3 R8.1 U4.40 Vmains.1 | length 58.5
  Top Layer w0.3: R8.1 v1(-12.167,-18.644) C17.2 ; -9.137,17.399 Vmains.1 ; U4.40 2.325,16.325 v1(3,17)
  Bottom Layer w0.3: v1(-12.167,-18.644) -12.167,-13.06 -12.4,-12.827 -12.4,2.5 -6.2,8.7 -6.2,16.106 Vmains.1 -5.588,17.399 -5.189,17 v1(3,17)
VREF: U4.13
XTAL: U4.25 Y1.3 | length 2.9
  Top Layer w0.3: U4.25 6.746,6.636 7.468,5.914 Y1.3@7.468,5.571
XTAL32: U4.14
pads on no net: LCD1.0 LCD1.3 LCD1.7 LCD1.8 LCD1.9 LCD1.10 LCD1.11 LCD1.12 LCD1.13 LCD1.14 LCD1.16 LCD1.17 LCD1.18 LCD1.21 LCD1.22 LCD1.23 LCD1.24 U3.12 U5.8 U6.8

## Polygon pours and split planes (outlines as drawn)
GND on Top Layer "Top Layer-No Net" (solid, remove dead copper, pour order 4): 46.66,-35.077 -46.296,-35.077 -46.296,35.021 46.66,35.021
GND on Bottom Layer "Top Layer-No Net" (solid, remove dead copper, pour order 3): 46.668,-35.318 -46.677,-35.318 -46.677,34.913 46.668,34.913

## Keep-outs
Top Layer:
  region: 46.152,-28.722 40.208,-28.722 40.208,-34.646 46.152,-34.646
  region: 46.152,34.646 40.208,34.646 40.208,28.722 46.152,28.722
  rectangle: -46.152,28.722 -40.208,34.646
  rectangle: -46.152,-34.646 -40.208,-28.722
  rectangle: -16.891,-7.62 -13.868,-6.35
Bottom Layer:
  region: 46.152,34.646 40.208,34.646 40.208,28.722 46.152,28.722
  region: 46.152,-28.722 40.208,-28.722 40.208,-34.646 46.152,-34.646
  rectangle: -46.152,-34.646 -40.208,-28.722
  rectangle: -46.152,28.722 -40.208,34.646
  rectangle: -16.891,-7.62 -13.868,-6.325
Keep-Out Layer:
  the board outline again, w0.254

## Other copper
Top Layer:
  rectangle net GND: 8.636,-31.877 10.16,-23.495
  rectangle net GND: 5.334,-28.194 13.589,-26.797
  region net 3V3: 3.869,6.592 3.869,12.18 -1.719,12.18 -1.719,6.592

## Silkscreen, mask and mechanical layers (free items; w line width, h text height)
Top Overlay:
  text "LCD Module" at -18.3,29.5 h1.27
  text "T962a Oven Controller V1.0" at -30.48,23.749 h1.27
  text "LEDs" at 40.259,12.954 h1.27 r90
  text "Expansion" at -36.83,8.255 h1.27 r90
  text "Spare" at 29.21,2.54 h1.27
  text "+12V" at 30.353,-2.286 h1.27
  text "Case" at 30.099,-6.604 h1.27
  text "Fan" at 30.099,-8.763 h1.27
  text "+12V" at 30.353,-12.954 h1.27
  text "Buttons" at -39.7,-13.462 h1.27 r90
  text "+12V" at 20.574,-23.368 h1.27 r90
  text "Oven Fan" at 26.162,-23.368 h1.27 r90
  text "+12V" at 30.988,-23.368 h1.27 r90
  text "Heater" at 36.576,-23.368 h1.27 r90
  text "TH1" at -17.399,-23.876 h1.27 r90
  text "TH2" at -37.846,-24.003 h1.27 r90
  text "N" at -36,-24 h1.27
  text "P" at -31,-24 h1.27
  text "N" at -26,-24 h1.27
  text "P" at -21.5,-24 h1.27
  text "9Vac" at -11.808,-30.5 h1.27 r90
  text "SSRs" at 39.9,-32.7 h1.27 r90
  text "Thermal isolation slot" at -14.859,-34.671 h1.27 r90

## Text inside footprints (layer, text, board x,y; h text height)
BR1: Top Overlay "~" at -8.001,-18.418 h0.76 r335; Top Overlay "~" at -2.921,-18.418 h0.76 r335; Top Overlay "+" at -2.667,-13.799 h0.76; Top Overlay "-" at -7.747,-13.799 h0.76
LCD1: Bottom Overlay "20" at -33.5,30.5 h1.27 r180; Bottom Overlay "1" at 15.5,30.5 h1.27 r180
Logo1: Top Overlay "o" at 36.195,15.113 h20.32; Top Overlay "OSHW" at 29.464,19.558 h1.52